# Altium PCB Copy of PCB1.PcbDoc (part 6 of 9)
Units mm, origin at the board's own origin, x right, y up, seen from the top; angles counter-clockwise.
Board outline 100 x 100 mm, 6 copper layers (Top Layer, Int1 (GND), Int2 (Sign), Int3 (Sign), Int4 (PWR), Bottom Layer), stack 1.538 mm thick; 614 components, 712 nets, 3013 pads, 501 vias.
Unrouted connection lines stored in the file: 259.
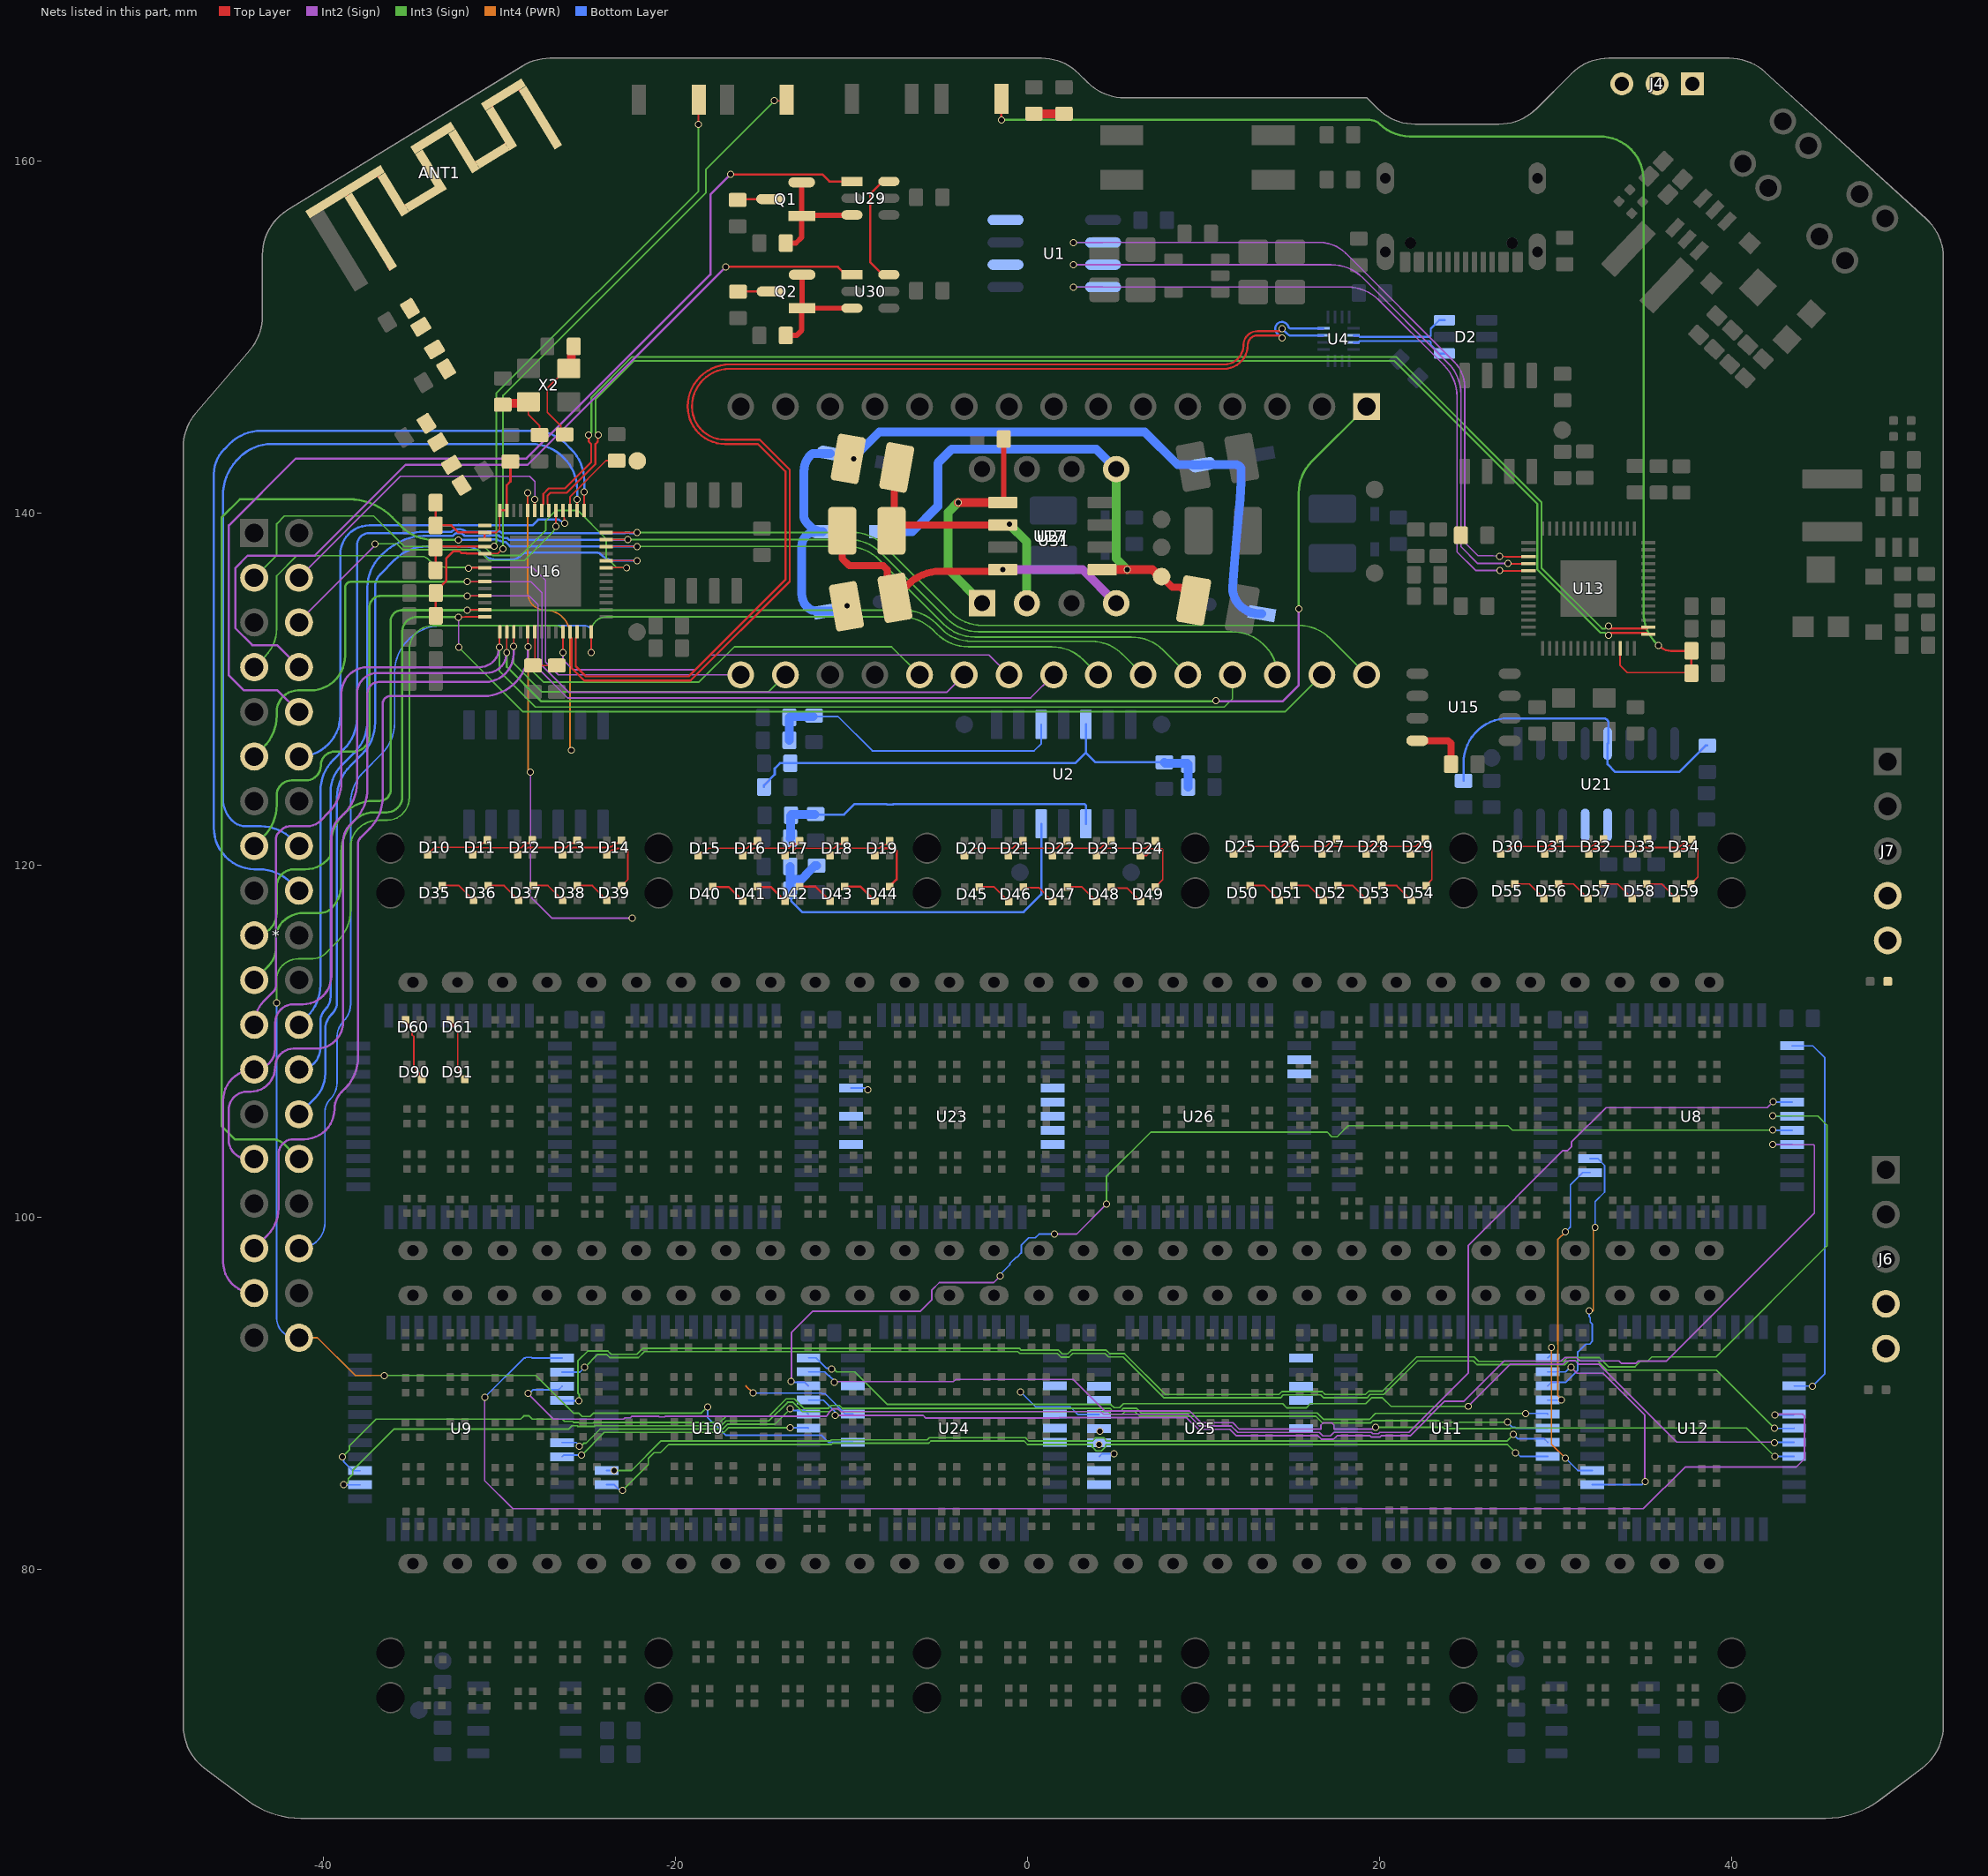
[diagram p9: the nets of this part, all layers, seen from the top]

## Via types
v1: diameter 0.4, hole 0.3, Top Layer to Bottom Layer, tented both sides, 494 vias
v2: diameter 0.4, hole 0.3, Top Layer to Bottom Layer, 5 vias
v3: diameter 0.4, hole 0.3, Top Layer to Bottom Layer, tented top, 1 vias
v4: diameter 0.6, hole 0.5, Top Layer to Bottom Layer, 1 vias

## Nets (pads, with @x,y where several pads share a name; then routed paths per layer and width w, separated by ;. In a path a pad name is that pad's centre, name@x,y a point inside that pad or via, vN(x,y) a via of type N, cw(c..) or ccw(c..) an arc to the next point about the centre after c; other vN are vias at no path point) (continued)
D0: *.29 Q1.3 R48.2 U16.17 U24.31 U31.17 | length 62.3
  Top Layer w0.09: v1(-29.211,132.436) -29.208,132.439 -29.208,133.262 U16.17@-29.204,133.265
  Top Layer w0.127: R48.2@-16.486,157.807 -16.436,157.858 Q1.3@-14.666,157.858
  Int2 (Sign) w0.127: *.29@-43.949,103.323 -44.313,103.323 cw(c-44.313,104.415) -45.405,104.415 -45.405,106.095 cw(c-44.355,106.095) -44.355,107.145 -44.157,107.145 ccw(c-44.157,108.537) -42.765,108.537 cw(c-41.715,108.537) -41.715,109.587 -40.428,109.587 ccw(c-40.428,111.12) -38.895,111.12 -38.895,121.405 cw(c-37.667,121.405) -38.535,122.273 -38.26,122.548 ccw(c-40.057,124.344) -37.517,124.344 -37.517,129.785 cw(c-36.882,129.785) -36.882,130.42 -30.828,130.42 ccw(c-30.828,132.032) -29.215,132.032 -29.215,132.436 v1(-29.211,132.436)
  Int3 (Sign) w0.09: v1(-29.211,132.436) -29.211,131.479 -27.59,129.858 -14.738,129.858 U31.17@-13.769,130.827
D1: *.7 Q2.3 R50.2 U16.7 U23.30 U31.16 | length 41.7
  Top Layer w0.09: v1(-31.778,136.882) -31.76,136.9 -30.875,136.9 U16.7@-30.857,136.918
  Top Layer w0.127: R50.2@-16.462,152.594 -16.449,152.608 Q2.3@-14.645,152.608
  Int2 (Sign) w0.09: v1(-31.778,136.882) -31.733,136.927 -28.129,136.927 -27.404,136.203 -27.404,131.555 -26.676,130.827 U31.16@-16.309,130.827
  Int3 (Sign) w0.09: *.7@-43.949,131.263 -43.324,131.888 ccw(c-44.891,133.455) -42.675,133.455 -42.675,136.025 cw(c-40.985,136.025) -42.673,136.111 -42.673,136.454 -41.532,137.595 -35.708,137.595 -35.661,137.548 -34.318,137.548 cw(c-34.592,136.776) -34.013,137.355 ccw(c-32.979,138.389) -32.979,136.927 -31.823,136.927 v1(-31.778,136.882)
  Bottom Layer w0.09: U23.30@-10.048,107.348 -9.133,107.348 -9.08,107.295 v1(-9.08,107.245)
D2: *.33 U16.19 U24.29 U31.20 | length 97.9
  Top Layer w0.09: U16.19@-28.404,133.265 -28.399,133.26 -28.399,132.42 v1(-28.393,132.414)
  Int2 (Sign) w0.09: v1(-28.254,125.31) -28.254,118.224 -27.03,117 v1(-22.47,117)
  Int2 (Sign) w0.127: *.33@-43.949,98.243 -43.201,98.991 ccw(c-44.725,100.515) -42.57,100.515 -42.57,103.587 cw(c-41.715,103.587) -41.715,104.442 -41.113,104.442 ccw(c-41.113,106.164) -39.39,106.164 cw(c-38.037,106.164) -38.994,107.121 -38.792,107.323 ccw(c-40.588,109.119) -38.048,109.119 -38.048,121.258 cw(c-37.611,121.258) -37.92,121.566 -37.395,122.092 ccw(c-39.191,123.888) -36.659,123.687 -36.659,129.168 -36.659,129.168 cw(c-36.206,129.168) -36.206,129.622 -30.933,129.622 ccw(c-30.933,132.162) v1@-28.405,132.413
  Int3 (Sign) w0.09: v1(-28.393,132.414) -28.393,131.292 -27.521,130.42 -18.677,130.42 -16.676,132.42 -7.743,132.42 U31.20@-6.149,130.827
  Int4 (PWR) w0.09: v1(-28.393,132.414) -28.393,125.449 ccw(c-28.254,125.449) v1(-28.254,125.31) ; -16.011,90.428 -15.623,90.041 v1(-15.6,90.041)
  Bottom Layer w0.09: v1(-15.6,90.041) -15.577,90.018 -11.725,90.018 -11.687,89.98 -11.512,89.98 -10.355,88.823 U24.29@-9.93,88.823
D3: *.11 U16.9 U23.28 U31.21 | length 54.3
  Top Layer w0.09: v1(-31.846,136.12) -31.844,136.118 U16.9@-30.857,136.118
  Int2 (Sign) w0.09: v1(-31.846,136.12) -28.233,136.12 -27.604,135.491 -27.604,131.355 -26.089,129.84 -4.596,129.84 U31.21@-3.609,130.827
  Int3 (Sign) w0.127: *.11@-43.949,126.183 -43.419,126.713 ccw(c-45.215,128.509) -42.675,128.509 -42.675,128.723 cw(c-41.453,128.723) -41.453,129.945 -40.749,129.945 ccw(c-40.749,131.904) -38.79,131.904 -38.79,135.764 cw(c-38.434,135.764) -38.434,136.12 v1(-31.846,136.12)
D4: *.38 U16.24 U24.27 U31.22 | length 118.2
  Top Layer w0.09: U16.24@-26.404,133.265 -26.404,132.034 -26.403,132.032 v1(-26.403,132.085)
  Int2 (Sign) w0.09: v1(-26.403,132.085) -26.403,131.681 -25.838,131.117 -18.883,131.117 -18.04,131.96 -2.202,131.96 U31.22@-1.069,130.827
  Int3 (Sign) w0.09: v1(-42.675,112.187) -42.675,113.523 cw(c-41.548,113.523) -42.345,114.32 cw(c-41.439,113.414) -41.439,114.695 -40.626,114.695 ccw(c-40.626,115.702) -39.914,114.99 -39.217,115.687 ccw(c-41.013,117.483) -38.473,117.483 -38.473,121.054 cw(c-37.022,121.054) -38.048,122.08 cw(c-36.866,120.898) -36.866,122.57 -36.374,122.57 ccw(c-36.374,123.756) -35.535,122.917 ccw(c-36.49,123.872) -35.14,123.872 -35.14,132.276 cw(c-33.799,132.276) -33.799,133.616 -26.767,133.616 cw(c-26.767,133.252) -26.403,133.252 v1(-26.403,132.085) ; v1(-36.555,91.02) -27.951,91.02 -25.814,88.883 -25.516,88.883 -25.326,88.693 -24.86,88.693 -24.67,88.883 -18.542,88.883 v1(-18.195,89.229)
  Int4 (PWR) w0.09: *.38@-41.409,93.163 -40.355,93.163 -38.212,91.02 v1(-36.555,91.02)
  Bottom Layer w0.09: v1(-42.675,112.187) -42.675,94.29 ccw(c-41.548,94.29) -41.548,93.163 *.38@-41.409,93.163 ; v1(-18.195,89.229) -18.195,88.649 -17.174,87.628 -11.735,87.628 -11.33,87.223 U24.27@-9.93,87.223
D5: *.15 U16.11 U23.26 U31.23 | length 63.1
  Top Layer w0.09: v1(-31.846,135.31) -31.839,135.318 U16.11@-30.857,135.318
  Int2 (Sign) w0.09: v1(-31.846,135.31) -28.333,135.31 -27.826,134.804 -27.826,131.198 -26.138,129.51 0.154,129.51 U31.23@1.471,130.827
  Int3 (Sign) w0.127: *.15@-43.949,121.103 -43.419,121.633 ccw(c-45.215,123.429) -42.675,123.429 -42.675,123.975 cw(c-41.82,123.975) -41.82,124.83 -41.01,124.83 ccw(c-41.01,125.67) -40.17,125.67 cw(c-39.375,125.67) -39.375,126.465 -38.325,126.465 ccw(c-38.325,127.38) -37.41,127.38 -37.41,134.657 cw(c-36.757,134.657) -36.757,135.31 v1(-31.846,135.31)
D6: *.34 U16.28 U24.3 U31.24 | length 81.5
  Top Layer w0.09: v1(-24.804,132.082) U16.28@-24.804,133.265
  Int3 (Sign) w0.09: v1(-24.804,132.082) -24.804,133.265 cw(c-23.952,133.265) -23.952,134.118 -7.186,134.118 cw(c-7.186,131.578) -5.39,133.374 -5.18,133.164 ccw(c-3.384,134.96) -3.384,132.42 1.365,132.42 cw(c1.365,129.88) 3.161,131.676 U31.24@4.011,130.827
  Bottom Layer w0.09: *.34@-41.409,98.243 ccw(c-41.409,99.722) -39.93,99.722 -39.93,106.011 cw(c-38.97,106.011) -39.649,106.69 ccw(c-40.623,107.665) -39.245,107.665 -39.245,110.275 cw(c-38.05,110.275) -38.895,111.12 ccw(c-39.914,112.139) -38.473,112.139 -38.473,123.519 cw(c-35.933,123.519) -37.729,125.315 -36.714,126.33 ccw(c-38.51,128.126) -35.97,128.126 -35.97,130.989 cw(c-33.43,130.989) -35.226,132.785 -35.139,132.872 cw(c-33.343,131.076) -33.343,133.616 -25.155,133.616 cw(c-25.155,133.265) -24.804,133.265 v1(-24.804,132.082)
D7: *.19 U16.13 U23.4 U31.25 | length 68.1
  Top Layer w0.09: v1(-31.841,134.5) -31.823,134.518 U16.13@-30.857,134.518
  Int3 (Sign) w0.09: v1(-31.841,134.5) -10.558,134.5 ccw(c-10.279,134.745) -10,134.5 -7.02,134.5 cw(c-7.02,131.96) -5.224,133.756 -4.744,133.275 ccw(c-3.178,135.275) -3.178,132.735 3.59,132.735 cw(c3.59,130.195) 5.386,131.991 U31.25@6.551,130.827
  Int3 (Sign) w0.127: *.19@-43.949,116.023 ccw(c-43.949,117.297) -42.675,117.297 -42.675,118.8 cw(c-41.7,118.8) -41.7,119.775 -41.053,119.775 ccw(c-41.053,121.509) -39.826,120.283 -39.738,120.371 ccw(c-40.039,120.672) -39.614,120.672 -39.614,121.114 cw(c-37.074,121.114) -38.87,122.91 -38.778,123.002 cw(c-37.179,121.403) -37.179,123.665 -36.825,123.665 ccw(c-36.825,124.287) -36.202,124.287 -36.202,133.868 cw(c-35.57,133.868) -35.57,134.5 v1(-31.841,134.5)
D8: *.30 U16.39 U24.5 U31.26 | length 100.3
  Top Layer w0.09: U16.39@-23.952,138.118 v1(-22.196,138.118)
  Int3 (Sign) w0.09: v1(-22.196,138.118) -10.245,138.118 cw(c-10.245,135.578) -8.449,137.374 -4.794,133.719 ccw(c-2.998,135.515) -2.998,132.975 5.89,132.975 cw(c5.89,130.435) 7.686,132.231 U31.26@9.091,130.827
  Int3 (Sign) w0.127: *.30@-41.409,103.323 -42.249,104.162 ccw(c-42.924,103.487) -42.924,104.442 -44.013,104.442 -45.057,104.442 -45.795,105.18 -45.795,139.779 -44.769,140.805 -38.585,140.805 cw(c-38.585,137.292) -36.1,139.776 -35.561,139.236 ccw(c-33.765,141.032) -33.765,138.492 v1(-32.345,138.492)
  Bottom Layer w0.127: v1(-32.345,138.492) -30.505,138.492 -30.484,138.513 -30.161,138.513 -30.125,138.478 cw(c-30.294,137.517) -29.816,138.367 -29.654,138.367 -29.426,138.139 -29.426,138.12 ccw(c-29.39,138.421) -29.39,138.118 v1(-22.196,138.118)
D9: *.23 U16.15 U23.6 U31.27 | length 79
  Top Layer w0.09: v1(-30.025,132.404) -30.025,132.933 U16.15@-30.004,133.265
  Int2 (Sign) w0.127: *.23@-43.449,111.443 *.23@-43.949,110.943 cw(c-42.014,110.943) -43.383,112.311 -42.882,112.811 ccw(c-43.31,113.239) -42.705,113.239 -42.705,121.567 cw(c-42.348,121.567) -42.6,121.819 -42.373,122.047 cw(c-41.955,121.629) -41.955,122.22 -40.965,122.22 ccw(c-40.965,123.332) -40.179,122.546 -39.738,122.986 ccw(c-41.534,124.782) -38.994,124.782 -38.994,129.785 cw(c-37.517,129.785) -37.517,131.263 -31.165,131.263 ccw(c-31.165,132.404) -30.118,131.95 ccw(c-30.234,132.001) -30.11,131.976 v1(-30.025,132.404)
  Int3 (Sign) w0.09: v1(-30.025,132.404) -30.025,131.048 -27.973,128.995 11.166,128.995 11.631,129.46 U31.27@11.631,130.827
D10: *.26 U16.40 U24.6 U31.28 | length 86.9
  Top Layer w0.09: U16.40@-23.952,138.518 -23.951,138.516 -23.179,138.516 cw(c-23.179,138.426) -23.173,138.516 ccw(c-23.167,138.606) -23.169,138.516 -23.101,138.514 v1(-22.72,138.508)
  Int3 (Sign) w0.09: v1(-22.72,138.508) -10.14,138.508 cw(c-10.14,135.968) -8.344,137.764 -4.599,134.019 ccw(c-2.803,135.815) -2.803,133.275 11.608,133.275 cw(c11.608,130.735) 13.404,132.531 13.508,132.427 cw(c11.907,130.827) U31.28@14.171,130.827
  Bottom Layer w0.127: *.26@-41.409,108.403 ccw(c-41.409,109.62) -40.192,109.62 -40.192,111.14 cw(c-39.245,111.14) -39.915,111.81 ccw(c-40.643,112.538) -39.614,112.538 -39.614,124.175 cw(c-37.499,124.175) -38.994,125.67 -38.26,126.404 ccw(c-40.057,128.2) -37.517,128.2 -37.517,135.783 cw(c-34.977,135.783) -36.773,137.579 -36.706,137.646 cw(c-35.352,136.293) -36.551,137.785 cw(c-34.843,136.077) -35.86,138.268 ; -35.859,138.268 ccw(c-35.913,138.383) -35.845,138.276 cw(c-34.343,135.952) -34.343,138.719 -32.723,138.719 ccw(c-32.723,138.846) -32.63,138.76 cw(c-32.345,138.492) -32.334,138.883 ccw(c-32.332,139.01) -32.329,138.883 cw(c-32.318,138.492) -32.001,138.719 -30.599,138.719 -30.578,138.74 -30.067,138.74 -30.013,138.686 cw(c-30.294,137.517) -29.76,138.594 -29.56,138.594 -29.458,138.492 -23.253,138.492 ccw(c-23.253,138.619) -23.248,138.492 -23.175,138.495 ; -23.174,138.495 v1(-22.72,138.508)
D11: *.21 U16.14 U23.5 U31.29 | length 83.2
  Top Layer w0.09: v1(-32.346,134.109) -31.968,134.118 cw(c-31.966,134.028) -31.966,134.118 U16.14@-30.857,134.118
  Int2 (Sign) w0.09: v1(-32.346,134.109) -32.337,134.1 -32.337,132.394 v1(-32.328,132.385)
  Int3 (Sign) w0.09: v1(-32.328,132.385) -28.673,128.731 14.614,128.731 U31.29@16.711,130.827
  Int3 (Sign) w0.127: *.21@-43.949,113.483 -43.156,114.276 ccw(c-44.245,115.365) -42.705,115.365 -42.705,115.921 cw(c-41.476,115.921) -42.345,116.79 cw(c-41.121,115.566) -41.121,117.297 -40.192,117.297 ccw(c-40.192,118.177) -39.57,117.555 ccw(c-40.96,118.945) -38.994,118.945 -38.994,120.776 cw(c-36.489,120.776) -38.26,122.548 cw(c-37.132,121.42) -37.132,123.015 -36.435,123.015 ccw(c-36.435,123.915) -35.535,123.915 -35.535,133.293 cw(c-34.718,133.293) -35.355,133.804 cw(c-34.718,133.293) -34.718,134.109 v1(-32.346,134.109)
D12: *.24 U16.41 U24.7 U31.30 | length 91
  Top Layer w0.09: U16.41@-23.952,138.918 v1(-22.187,138.918)
  Int3 (Sign) w0.09: v1(-22.187,138.918) -9.965,138.918 cw(c-9.965,136.378) -8.169,138.174 -4.374,134.379 ccw(c-2.578,136.175) -2.578,133.635 15.39,133.635 cw(c15.39,131.095) 17.186,132.891 U31.30@19.251,130.827
  Bottom Layer w0.127: *.24@-41.409,110.943 -40.936,111.416 ccw(c-42.732,113.212) -40.192,113.212 -40.192,124.209 cw(c-37.652,124.209) -39.448,126.005 -38.859,126.595 ccw(c-40.655,128.391) -38.115,128.391 -38.115,138.178 cw(c-37.41,138.178) -37.41,138.883 -34.969,138.883 ccw(c-34.969,139.01) -34.944,138.885 cw(c-34.343,135.952) -34.343,138.946 -32.811,138.946 ccw(c-32.811,139.073) -32.732,138.974 cw(c-32.345,138.492) -32.333,139.11 ccw(c-32.332,139.237) -32.33,139.11 cw(c-32.318,138.492) -31.9,138.946 -30.693,138.946 -30.672,138.967 -29.973,138.967 -29.895,138.89 cw(c-30.294,137.517) -29.89,138.888 ccw(c-29.854,139.01) -29.854,138.883 -22.926,138.883 ccw(c-22.926,139.01) -22.895,138.887 cw(c-22.799,138.508) -22.769,138.898 ccw(c-22.759,139.024) -22.751,138.898 cw(c-22.72,138.508) -22.624,138.887 ccw(c-22.593,139.01) -22.593,138.883 -22.222,138.883 ccw(c-22.222,138.918) v1(-22.187,138.918)
D13: *.25 *.35 U16.16 U23.7 U31.1 | length 114.6
  Top Layer w0.09: v1(-29.606,132.085) -29.604,132.464 U16.16@-29.604,133.265
  Int2 (Sign) w0.127: *.35@-43.949,95.703 cw(c-43.949,97.473) -45.72,97.473 -45.72,106.632 cw(c-43.949,106.632) *.25@-43.949,108.403 ccw(c-43.949,109.587) -42.765,109.587 -42.765,111.06 cw(c-41.715,111.06) -41.715,112.11 -41.189,112.11 ccw(c-41.189,113.729) -39.57,113.729 -39.57,121.638 cw(c-38.198,121.638) -39.168,122.608 -38.859,122.917 ccw(c-40.655,124.713) -38.115,124.713 -38.115,129.75 cw(c-36.93,129.75) -36.93,130.935 -30.754,130.935 ccw(c-30.754,132.085) -29.698,131.631 ccw(c-29.814,131.681) -29.69,131.657 v1(-29.606,132.085) ; v1(10.692,129.367) 10.744,129.316 14.464,129.316 15.39,130.243 v1(15.39,134.565)
  Int3 (Sign) w0.127: v1(-29.606,132.085) -29.606,131.29 -27.632,129.316 10.641,129.316 v1(10.692,129.367) ; v1(15.39,134.565) 15.39,141.154 cw(c17.93,141.154) 16.134,142.95 U31.1@19.251,146.067
DAC-SS_1: U1.2 U13.3 | length 40.4
  Top Layer w0.09: v1(26.809,137.563) 27.182,137.535 ccw(c27.189,137.625) 27.189,137.535 U13.3@28.453,137.535
  Int2 (Sign) w0.09: v1(2.592,155.388) 16.6,155.388 cw(c16.6,153.326) 18.058,154.784 24.221,148.621 cw(c22.763,147.163) 24.825,147.163 24.825,138.346 25.577,137.593 26.429,137.593 cw(c26.429,137.503) 26.436,137.593 v1(26.809,137.563)
  Bottom Layer w0.09: v1(2.592,155.388) U1.2@4.275,155.388
DAC_0_OUT_9: U1.8 U21.13
DAC_1_OUT_9: U1.6 U21.12
DAC_CLOCK_1: U1.3 U13.4 | length 40
  Top Layer w0.09: v1(27.29,137.152) 27.308,137.135 U13.4@28.453,137.135
  Int2 (Sign) w0.09: v1(2.592,154.128) 17.241,154.128 cw(c17.241,151.588) 19.037,153.384 23.866,148.556 cw(c22.069,146.76) 24.609,146.76 24.609,138.11 25.567,137.152 v1(27.29,137.152)
  Bottom Layer w0.09: v1(2.592,154.128) U1.3@4.275,154.128
DAC_DATA_1: U1.4 U13.5 | length 39.8
  Top Layer w0.09: v1(26.82,136.761) 26.845,136.735 U13.5@28.453,136.735
  Int2 (Sign) w0.09: v1(2.592,152.858) 18.154,152.858 cw(c18.154,150.318) 19.95,152.114 23.648,148.416 cw(c21.852,146.62) 24.392,146.62 24.392,137.807 25.438,136.761 v1(26.82,136.761)
  Bottom Layer w0.09: v1(2.592,152.858) U1.4@4.275,152.858
DE0_3: U8.5 U9.3 | length 87.8
  Int2 (Sign) w0.09: v1(-28.399,90.003) -26.939,88.543 -22.961,88.543 -22.886,88.618 -22.578,88.618 -22.497,88.699 -20.97,88.699 -20.939,88.668 -20.631,88.668 -20.601,88.699 -11.462,88.699 -11.304,88.856 -11.304,88.909 -11.086,89.127 -10.778,89.127 -10.619,88.968 4.139,88.968 4.295,88.812 9.11,88.812 9.773,88.149 11.565,88.149 11.926,87.788 16.566,87.788 16.765,87.589 17.2,87.589 17.399,87.788 19.531,87.788 19.61,87.709 19.918,87.709 19.997,87.788 21.65,87.788 25.031,91.168 25.031,98.415 30.414,103.798 30.672,103.798 30.89,104.016 30.89,104.275 32.855,106.239 42.013,106.239 v1(42.35,106.576)
  Bottom Layer w0.09: v1(-28.399,90.003) -28.326,90.003 -28.126,90.203 -26.665,90.203 U9.3@-26.46,90.408 ; v1(42.35,106.576) 42.379,106.548 U8.5@43.422,106.548
DE1_3: U8.6 U9.4 | length 91.5
  Int3 (Sign) w0.09: v1(-25.503,89.586) -25.489,89.6 -25.489,89.948 -25.552,90.011 -25.552,91.864 -25.007,92.409 -23.852,92.409 -23.671,92.228 -22.201,92.228 -21.859,92.57 -0.489,92.57 -0.379,92.46 1.748,92.46 1.956,92.252 2.264,92.252 2.472,92.46 4.456,92.46 4.653,92.262 5.495,92.262 7.816,89.941 14.272,89.941 14.438,90.107 16.73,90.107 16.896,89.941 19.187,89.941 19.377,90.131 20.154,90.131 22.093,92.07 25.357,92.07 25.606,91.821 30.429,91.821 30.645,92.037 32.471,92.037 32.991,91.517 34.501,91.517 34.826,91.842 35.227,91.842 35.456,92.07 39.094,92.07 45.405,98.382 45.405,105.24 44.882,105.763 v1(42.323,105.763)
  Bottom Layer w0.09: U9.4@-26.46,89.608 -26.413,89.561 -26.388,89.586 v1(-25.503,89.586) ; v1(42.323,105.763) 42.338,105.748 U8.6@43.422,105.748
DEV_BOOT: *.28 U16.37 U25.3 | length 49.5
  Top Layer w0.09: U16.37@-23.952,137.318 v1(-22.199,137.318)
  Bottom Layer w0.127: *.28@-41.409,105.863 -40.503,106.769 ccw(c-41.923,108.189) -39.915,108.189 -39.915,110.689 cw(c-38.737,110.689) -39.57,111.521 -39.533,111.559 ccw(c-40.227,112.253) -39.245,112.253 -39.245,123.846 cw(c-36.705,123.846) -38.501,125.642 -37.824,126.319 ccw(c-39.62,128.115) -37.08,128.115 -37.08,135.831 cw(c-36.083,135.831) -36.788,136.536 -35.95,137.374 cw(c-34.154,135.578) -34.154,138.118 -32.473,138.118 cw(c-32.473,137.991) -32.441,138.114 ccw(c-32.345,138.492) -32.334,138.102 cw(c-32.332,137.975) -32.329,138.102 ccw(c-32.318,138.492) -32.208,138.118 -31.973,138.118 cw(c-31.973,136.752) -31.008,137.718 ccw(c-30.179,138.546) -30.179,137.375 -29.361,137.375 ccw(c-29.361,138.16) -29.086,137.424 ccw(c-29.361,138.16) -28.806,137.605 cw(c-28.418,137.218) -28.418,137.765 -24.479,137.765 cw(c-24.479,137.491) -24.285,137.685 ccw(c-23.398,138.572) -23.398,137.318 v1(-22.199,137.318)
DEV_RESET: *.3 U16.36 U25.4 | length 29.1
  Top Layer w0.09: U16.36@-23.952,136.918 v1(-22.788,136.918)
  Int3 (Sign) w0.09: *.3@-43.949,136.343 -42.675,137.617 -42.675,139.41 -42.23,139.855 -37.161,139.855 -35.424,138.118 -30.895,138.118 -30.382,137.605 -28.822,137.605 -27.385,139.042 -27.385,139.589 -26.804,140.17 -25.572,140.17 -23.952,138.55 -23.952,137.5 -23.37,136.918 v1(-22.788,136.918)
DF0_3: U8.7 U10.3 | length 67.5
  Int2 (Sign) w0.09: v1(-13.446,90.676) -13.428,90.694 -13.428,93.462 -12.225,94.665 -6.12,94.665 -5.449,95.336 -5.449,95.875 -5.026,96.298 -1.941,96.298 v1(-1.569,96.67) ; v1(1.514,99.051) 2.766,99.051 v1(4.47,100.755)
  Int3 (Sign) w0.09: v1(4.47,100.755) 4.47,102.329 6.988,104.846 17.015,104.846 17.274,104.588 17.582,104.588 18.205,105.21 27.281,105.21 27.532,104.96 v1(42.316,104.96)
  Bottom Layer w0.09: v1(-13.446,90.676) -13.398,90.628 -12.665,90.628 U10.3@-12.46,90.423 ; v1(-1.569,96.67) -1.569,96.754 -1.015,97.307 -1.015,97.382 -0.653,97.744 -0.606,97.744 -0.369,97.981 -0.369,98.415 0.054,98.838 0.426,98.838 0.637,99.048 1.511,99.048 v1(1.514,99.051) ; v1(42.316,104.96) 42.328,104.948 U8.7@43.422,104.948
DF1_3: U8.8 U10.4 | length 71.2
  Int2 (Sign) w0.09: v1(-10.932,88.755) -5.95,88.755 -5.791,88.596 -5.79,88.597 1.762,88.597 1.787,88.622 9.031,88.622 9.694,87.959 11.487,87.959 11.848,87.598 16.487,87.598 16.686,87.399 17.367,87.399 17.566,87.598 19.452,87.598 19.531,87.519 19.996,87.519 20.075,87.598 21.729,87.598 23.693,89.561 24.784,89.561 27.068,91.845 30.311,91.845 30.502,92.037 30.69,92.037 30.704,92.052 31.17,92.052 31.377,91.845 33.593,91.845 33.731,91.707 34.548,91.707 34.683,91.842 36.29,91.842 44.692,100.244 44.692,104.08 44.64,104.133 v1(42.316,104.133)
  Bottom Layer w0.09: U10.4@-12.46,89.623 -11.616,89.623 -10.932,88.939 v1(-10.932,88.755) ; v1(42.316,104.133) 42.331,104.148 U8.8@43.422,104.148
DG0_3: U8.25 U11.3 | length 15.7
  Int4 (PWR) w0.09: v1(31.899,94.684) 31.906,94.691 32.132,94.691 32.132,99.239 32.234,99.341 v1(32.234,99.425)
  Bottom Layer w0.09: U11.3@29.54,90.423 29.745,90.628 30.556,90.628 31.25,91.321 31.25,92.358 31.698,92.806 31.924,92.806 32.068,92.949 32.068,93.952 31.958,94.062 31.958,94.304 31.899,94.363 v1(31.899,94.684) ; U8.25@31.952,103.348 32.377,103.348 32.772,102.953 32.772,101.438 32.234,100.899 v1(32.234,99.425)
DG1_3: U8.24 U11.4 | length 14.8
  Int4 (PWR) w0.09: v1(30.31,89.622) 30.31,89.697 30.111,89.896 30.111,92.457 30.124,92.47 30.124,92.778 30.111,92.791 30.111,98.742 v1(30.545,99.176)
  Bottom Layer w0.09: U11.4@29.54,89.623 30.309,89.623 v1(30.31,89.622) ; v1(30.545,99.176) 30.794,99.425 30.799,99.42 30.825,99.42 30.825,101.846 31.527,102.548 U8.24@31.952,102.548
DH0_3: U8.1 U12.3 | length 22.1
  Bottom Layer w0.09: U8.1@43.422,109.748 44.605,109.748 45.285,109.067 45.285,91.121 v1(44.582,90.418) 44.578,90.423 U12.3@43.54,90.423
EF0_3: U9.7 U10.5 | length 15.1
  Int3 (Sign) w0.09: v1(-25.479,87.003) -25.395,87.003 -25.228,87.17 -25.108,87.17 -24.305,87.973 -17.341,87.973 -17.068,88.246 -14.377,88.246 v1(-13.494,89.13)
  Bottom Layer w0.09: U9.7@-26.46,87.208 -25.656,87.208 -25.479,87.031 v1(-25.479,87.003) ; v1(-13.494,89.13) -13.41,89.13 -13.307,89.028 -12.665,89.028 U10.5@-12.46,88.823
EF1_3: U9.8 U10.6 | length 14.7
  Int3 (Sign) w0.09: v1(-25.347,86.492) -24.056,87.783 -17.262,87.783 -16.989,88.056 -13.494,88.056 v1(-13.491,88.053)
  Bottom Layer w0.09: U9.8@-26.46,86.408 -26.376,86.492 v1(-25.347,86.492) ; v1(-13.491,88.053) -12.497,88.053 -12.494,88.056 U10.6@-12.46,88.023
EG0_3: U9.25 U11.5 | length 72.7
  Int3 (Sign) w0.09: v1(-38.932,86.408) -38.545,86.795 -38.545,87.013 -37.016,88.543 -28.815,88.543 -28.633,88.725 -28.325,88.725 -28.143,88.543 -26.441,88.543 -26.316,88.418 -25.873,88.418 -25.808,88.353 -25.524,88.353 -25.483,88.313 -24.703,88.313 -24.663,88.353 -17.499,88.353 -17.153,88.699 -14.72,88.699 -13.726,89.692 -13.261,89.692 -12.727,89.158 -11.324,89.158 -11.165,89.317 -10.7,89.317 -10.541,89.158 4.668,89.158 4.824,89.002 5.289,89.002 5.445,89.158 6.169,89.158 6.432,88.895 16.437,88.895 16.809,88.523 19.411,88.523 19.753,88.865 v1(28.274,88.865)
  Bottom Layer w0.09: v1(-38.932,86.408) -38.873,86.349 -38.873,86.126 -38.355,85.608 U9.25@-37.93,85.608 ; v1(28.274,88.865) 29.498,88.865 U11.5@29.54,88.823
EG1_3: U9.24 U11.6 | length 72.5
  Int3 (Sign) w0.09: v1(-38.877,84.808) -38.793,84.808 -38.606,84.994 -38.606,85.159 -38.355,85.41 -38.355,85.628 -36.002,87.981 -26.068,87.981 -25.886,88.163 -25.602,88.163 -25.562,88.123 -24.624,88.123 -24.584,88.163 -17.42,88.163 -17.146,88.436 -14.713,88.436 -13.648,89.502 -13.339,89.502 -12.805,88.968 -11.245,88.968 -11.086,89.127 -10.778,89.127 -10.619,88.968 4.59,88.968 4.745,88.812 5.368,88.812 5.524,88.968 6.09,88.968 6.353,88.705 16.358,88.705 16.73,88.333 19.49,88.333 19.61,88.453 23.35,88.453 23.433,88.369 v1(27.257,88.369)
  Bottom Layer w0.09: v1(-38.877,84.808) U9.24@-37.93,84.808 ; v1(27.257,88.369) 27.257,88.353 27.518,88.093 27.681,88.093 27.751,88.023 U11.6@29.54,88.023
EH0_3: U9.1 U12.5 | length 92.2
  Int2 (Sign) w0.09: v1(-30.855,89.781) -30.855,85.041 -29.261,83.447 34.974,83.447 37.344,85.818 43.653,85.818 44.13,86.295 44.13,88.717 44.025,88.823 42.482,88.823 v1(42.44,88.781)
  Bottom Layer w0.09: v1(-30.855,89.781) -28.628,92.008 -28.561,92.008 -28.517,92.052 -28.208,92.052 -28.164,92.008 U9.1@-26.46,92.008 ; v1(42.44,88.781) 43.498,88.781 U12.5@43.54,88.823
EH1_3: U9.2 U12.6 | length 74.7
  Int3 (Sign) w0.09: v1(-25.176,91.475) -24.432,92.219 -23.931,92.219 -23.75,92.038 -22.122,92.038 -21.78,92.38 -0.567,92.38 -0.457,92.27 1.67,92.27 1.878,92.062 2.343,92.062 2.551,92.27 4.377,92.27 4.575,92.072 5.416,92.072 7.737,89.751 14.351,89.751 14.517,89.917 16.651,89.917 16.817,89.751 19.266,89.751 19.456,89.941 20.233,89.941 22.145,91.853 25.306,91.853 25.528,91.631 30.508,91.631 30.724,91.847 32.392,91.847 32.913,91.327 39.12,91.327 v1(42.431,88.015)
  Bottom Layer w0.09: U9.2@-26.46,91.208 -25.443,91.208 v1(-25.176,91.475) ; v1(42.431,88.015) 43.532,88.015 U12.6@43.54,88.023
ESD_U+_2: D2.6 U4.2 | length 5.8
  Bottom Layer w0.116: U4.2@18.506,150.108 18.785,150.108 18.863,150.029 21.901,150.029 22.829,150.029 22.897,150.097 22.897,150.495 23.381,150.979 D2.6@23.681,150.979
ESD_U-_2: D2.4 U4.3 | length 5.6
  Bottom Layer w0.116: U4.3@18.506,149.708 18.785,149.708 18.863,149.786 21.8,149.786 22.829,149.786 22.897,149.718 22.897,149.563 23.381,149.079 D2.4@23.681,149.079
ESP32_Rx_1: U13.29 U16.49 | length 77.6
  Top Layer w0.116: U16.49@-27.204,140.17 -27.204,140.448 -27.283,140.527 -27.283,141.008 -27.12,141.171 -26.2,141.171 -24.562,142.809 -24.562,143.94 -24.425,144.076 -24.425,144.439 v1(-24.415,144.45) ; v1(32.992,133.071) 33.135,133.213 35.182,133.213 U13.29@35.26,133.135
  Int3 (Sign) w0.105: v1(-24.415,144.45) -24.562,144.597 -24.562,146.483 -22.382,148.663 20.829,148.663 28.95,140.543 28.95,136.807 32.538,133.219 32.783,133.219 32.931,133.071 v1(32.992,133.071)
ESP32_Tx_1: U13.30 U16.50 | length 78
  Top Layer w0.116: U16.50@-27.604,140.17 -27.604,140.448 -27.526,140.527 -27.526,141.109 -27.221,141.414 -26.301,141.414 -24.804,142.91 -24.804,143.94 -24.941,144.076 -24.941,144.444 v1(-24.947,144.45) ; v1(32.992,133.598) 33.135,133.456 35.182,133.456 U13.30@35.26,133.535
  Int3 (Sign) w0.105: v1(-24.947,144.45) -24.942,144.45 -24.794,144.597 -24.794,146.58 -22.478,148.896 20.926,148.896 29.182,140.639 29.182,136.903 32.634,133.451 32.783,133.451 32.931,133.598 v1(32.992,133.598)
ESP_1_N: U4.12 U16.25 | length 70.7
  Top Layer w0.116: U16.25@-26.004,133.265 -26.004,132.988 -25.926,132.909 -25.926,131.213 -25.211,130.497 -19.159,130.497 -13.527,136.13 -13.527,142.484 -15.225,144.183 -17.196,144.183 cw(c-17.196,146.067) -19.08,146.067 cw(c-16.932,146.067) -16.932,148.215 11.148,148.215 ccw(c11.148,149.565) 12.498,149.565 cw(c13.04,149.565) 13.04,150.108 14.298,150.108 cw(c14.298,149.966) v1(14.44,149.966)
  Int2 (Sign) w0.105: v1(14.44,149.966) v1@14.44,150.113
  Bottom Layer w0.116: v1(14.44,149.966) 14.177,150.212 cw(c14.44,150.493) 14.812,150.593 ccw(c14.923,150.624) 14.923,150.508 U4.12@16.804,150.508
ESP_1_P: U4.11 U16.26 | length 68.8
  Top Layer w0.116: U16.26@-25.604,133.265 -25.604,132.988 -25.683,132.909 -25.683,131.313 -25.11,130.74 -25.068,130.74 -19.26,130.74 -13.769,136.231 -13.769,142.383 -15.326,143.94 -17.196,143.94 cw(c-17.196,146.067) -19.323,146.067 cw(c-16.932,146.067) -16.932,148.458 11.148,148.458 ccw(c11.148,149.565) 12.255,149.565 cw(c13.04,149.565) 13.04,150.35 14.298,150.35 ccw(c14.298,150.493) v1(14.44,150.493)
  Bottom Layer w0.116: v1(14.44,150.493) 14.702,150.248 cw(c14.44,149.966) 14.704,150.246 14.818,150.139 ccw(c14.897,150.224) 14.897,150.108 U4.11@16.804,150.108
ESP_ANT_6: C55.2 C56.2 L1.2 L2.1
ESP_BOOT_6: C72.2 R39.1 SW5.2 U16.5 | length 39.6
  Top Layer w0.09: U16.5@-30.857,137.718 -30.852,137.723 -30.1,137.723 -29.846,137.977 v1(-29.816,137.977) ; v1(-14.4,163.44) -13.763,163.44 SW5.2@-13.695,163.508
  Top Layer w0.127: C72.2@-33.64,134.18 R39.1@-33.64,135.47 -33.64,135.57 -33.045,136.164 -33.045,137.425 -32.617,137.853 -32.293,137.853 -32.186,137.746 -31.904,137.746 -31.876,137.718 U16.5@-30.857,137.718
  Int3 (Sign) w0.09: v1(-29.816,137.977) -29.816,146.704 -18.285,158.235 -18.285,159.555 v1(-14.4,163.44)
ESP_PWR_FILTERED_6: C58.2 C59.2 C60.2 C61.2 C65.2 L4.2 TP3.1 U16.2 U16.3 U16.20 U16.46 U16.55 U16.56 | length 17.5
  Top Layer w0.09: U16.2@-30.857,138.918 -30.2,138.918 -30.004,139.113 U16.56@-30.004,140.17 ; U16.20@-28.004,133.265 -28.004,131.458 C61.2@-28.108,131.355 C65.2@-26.767,131.355 ; U16.46@-26.004,140.17 -26.004,140.947 -23.956,142.996 C60.2@-23.362,142.996
  Top Layer w0.127: C59.2@-33.645,140.608 L4.2@-33.645,139.318 -32.745,139.318 -32.345,138.918 U16.2@-30.857,138.918 U16.3@-30.857,138.518 ; U16.56@-30.004,140.17 U16.55@-29.604,140.17 -29.604,141.598 -29.392,141.81 C58.2@-29.392,142.95
ESP_RESET_1: C71.2 R38.1 SW4.2 U16.4 U23.8 | length 34.9
  Top Layer w0.09: U16.4@-30.857,138.118 -30.524,138.102 -30.323,138.097 v1@-30.323,138.122 ; v1(-18.708,162.088) -18.708,163.495 SW4.2@-18.695,163.508
  Top Layer w0.127: C71.2@-33.645,136.758 R38.1@-33.645,138.058 -33.585,138.118 -32.473,138.118 cw(c-32.473,137.991) -32.441,138.114 ccw(c-32.345,138.492) -32.334,138.102 cw(c-32.332,137.975) -32.329,138.102 ccw(c-32.318,138.492) -32.208,138.118 U16.4@-30.857,138.118
  Int3 (Sign) w0.09: v1(-30.322,138.122) -30.322,138.206 -30.2,138.329 -30.2,146.815 -18.708,158.307 v1(-18.708,162.088)
ESP_XTAL_IN1_6: C69.2 L3.2 X2.3 | length 3.8
  Top Layer w0.09: X2.3@-28.375,146.335 -28.375,145.612 -27.745,144.983 L3.2@-27.745,144.458
  Top Layer w0.5: C69.2@-29.954,146.295 C69.2@-29.829,146.17 -29.746,146.252 -28.458,146.252 X2.3@-28.375,146.335
ESP_XTAL_IN2_6: C68.2 R37.1 X2.1 | length 6.2
  Top Layer w0.09: R37.1@-26.31,144.48 -26.526,144.696 -26.526,144.962 -27.299,145.735 -27.299,147.111 -26.175,148.235 X2.1@-26.075,148.235
  Top Layer w0.5: X2.1@-26.075,148.235 -25.937,148.373 -25.937,149.349 C68.2@-25.799,149.486 C68.2@-25.844,149.531
EX_GND_1: J7.5 JP6.1 U25.6
EXT_1_1: J4.1 U25.25
EXT_2_1: J4.2 U25.24
EXT_3_1: J4.3 U25.1
FG0_3: U10.25 U11.7 | length 54.8
  Int3 (Sign) w0.09: v1(-23.505,85.622) -22.522,85.622 -20.848,87.295 -11.227,87.295 -11.165,87.357 -5.717,87.357 -5.583,87.491 -0.134,87.491 0.061,87.295 3.658,87.295 3.671,87.295 3.854,87.479 4.321,87.479 4.418,87.382 4.418,87.348 ccw(c4.5,87.385) 4.5,87.295 27.211,87.295 v1(27.583,87.667)
  Bottom Layer w0.09: U10.25@-23.93,85.623 -23.929,85.622 v1(-23.505,85.622) ; v1(27.583,87.667) 27.823,87.428 29.335,87.428 U11.7@29.54,87.223
FG1_3: U10.24 U11.8 | length 55.8
  Int3 (Sign) w0.09: v1(-23.015,84.495) -21.56,85.95 -21.56,86.315 -21.237,86.638 -20.872,86.638 -20.409,87.1 -11.153,87.1 -11.086,87.167 -5.638,87.167 -5.504,87.301 -0.213,87.301 -0.013,87.1 3.656,87.1 cw(c3.655,87.01) 3.668,87.099 3.668,86.953 3.886,86.735 4.194,86.735 4.412,86.953 4.412,87.04 4.423,87.05 cw(c4.503,87.01) 4.502,87.1 ; 4.503,87.1 27.252,87.1 v1(27.721,86.632)
  Bottom Layer w0.09: U10.24@-23.93,84.823 -23.505,84.823 -23.237,84.554 -23.074,84.554 v1(-23.015,84.495) ; v1(27.721,86.632) 27.777,86.632 27.986,86.423 U11.8@29.54,86.423
FH0_3: U10.1 U12.7 | length 60.9
  Int2 (Sign) w0.09: v1(25.016,89.267) 27.404,91.655 30.389,91.655 30.581,91.847 30.768,91.847 30.783,91.862 31.091,91.862 31.298,91.655 32.45,91.655 36.87,87.235 42.385,87.235 v1(42.419,87.201)
  Int3 (Sign) w0.09: v1(-11.155,91.377) -11.135,91.397 -10.965,91.397 -10.965,91.324 -10.863,91.223 -9.829,91.223 -7.981,89.374 4.721,89.374 4.903,89.192 5.211,89.192 5.429,89.41 5.429,89.418 14.479,89.418 14.723,89.173 15.81,89.173 16.054,89.418 19.201,89.418 19.535,89.751 20.154,89.751 20.639,89.267 v1(25.016,89.267)
  Bottom Layer w0.09: U10.1@-12.46,92.023 -12.035,92.023 -11.487,91.475 -11.483,91.48 -11.44,91.437 -11.214,91.437 v1(-11.155,91.377) ; v1(42.419,87.201) 42.44,87.223 U12.7@43.54,87.223
FH1_3: U10.2 U12.8 | length 58.9
  Int2 (Sign) w0.09: v1(-10.988,90.633) -10.988,90.668 -4.226,90.668 -4.098,90.795 2.58,90.795 4.368,89.007 9.183,89.007 9.852,88.339 11.644,88.339 12.005,87.978 16.655,87.978 16.655,88.007 16.655,88.011 16.655,88.201 16.786,88.333 17.267,88.333 17.399,88.201 17.399,88.011 17.399,88.007 17.399,87.978 19.661,87.978 v1(19.764,88.081)
  Int3 (Sign) w0.09: v1(19.764,88.081) 23.576,88.081 23.659,87.997 27.387,87.997 27.429,88.039 40.821,88.039 v1(42.438,86.423)
  Bottom Layer w0.09: U10.2@-12.46,91.223 -11.527,91.223 -11.309,91.005 -11.274,91.005 -10.988,90.719 -10.988,90.668 v1(-10.988,90.633) ; v1@42.438,86.423 U12.8@43.54,86.423
GH0_3: U11.1 U12.25 | length 9.1
  Int4 (PWR) w0.09: v1(29.752,92.605) 29.752,87.115 v1(30.542,86.325)
  Bottom Layer w0.09: U11.1@29.54,92.023 29.547,92.023 29.752,92.228 v1(29.752,92.605) ; v1(30.542,86.325) 31.244,85.623 U12.25@32.07,85.623
GH1_3: U11.2 U12.24 | length 13.6
  Int2 (Sign) w0.09: v1(30.878,91.475) 31.209,91.144 32.692,91.144 35.047,88.789 35.047,85.011 v1(35.069,84.99)
  Bottom Layer w0.09: U11.2@29.54,91.223 30.551,91.223 30.804,91.475 v1(30.878,91.475) ; U12.24@32.07,84.823 34.902,84.823 v1(35.069,84.99)
GPIO0_RP_1: R40.1 U26.2 U29.6 U30.6 | length 6.6
  Top Layer w0.127: U30.6@-7.894,153.558 -8.232,153.558 -8.955,154.281 -8.955,158.135 -8.233,158.858 U29.6@-7.895,158.858
GPIO39: *.18 U16.44 U25.31 | length 52.3
  Top Layer w0.09: U16.44@-25.204,140.17 v1(-25.204,141.221)
  Bottom Layer w0.127: *.18@-41.409,118.563 -41.878,119.031 ccw(c-43.674,117.235) -43.674,119.775 cw(c-43.867,122.145) -46.245,122.146 -46.245,142.236 cw(c-44.268,142.236) -45.666,143.634 -45.348,143.952 cw(c-43.552,142.156) -43.552,144.696 -28.043,144.696 cw(c-28.043,142.156) -26.247,143.952 -25.948,143.654 cw(c-27.744,141.858) -25.204,141.858 v1(-25.204,141.221)
GPIO40: *.16 U16.45 U25.30 | length 47.3
  Top Layer w0.09: U16.45@-25.604,140.17 v1(-25.604,140.803)
  Bottom Layer w0.127: *.16@-41.409,121.103 -41.783,121.476 ccw(c-43.579,119.68) -43.579,122.22 -44.418,122.22 cw(c-44.418,123.332) -45.204,122.546 cw(c-43.923,123.827) -45.735,123.827 -45.735,140.99 cw(c-42.733,140.99) -44.769,143.196 cw(c-42.973,141.4) -42.973,143.94 -28.197,143.94 cw(c-28.197,141.4) -26.401,143.196 -26.348,143.143 cw(c-28.144,141.347) -25.604,141.347 v1(-25.604,140.803)
GPIO41: *.12 U16.47 U25.29 | length 32.4
  Top Layer w0.09: U16.47@-26.404,140.17 -26.35,139.838 v1(-26.307,139.446)
  Bottom Layer w0.09: v1(-0.41,90.083) 0.445,89.228 2.416,89.228 2.836,88.808 U25.29@4.055,88.808
  Bottom Layer w0.127: *.12@-41.409,126.183 ccw(c-41.409,128.532) -39.06,128.532 -39.06,137.668 cw(c-37.41,137.668) -37.41,139.318 -32.537,139.318 ccw(c-32.537,139.445) -32.512,139.32 cw(c-32.345,138.492) -32.333,139.337 ccw(c-32.332,139.464) -32.33,139.337 cw(c-32.318,138.492) -32.14,139.318 -28.14,139.318 -27.816,139.642 -26.954,139.642 ccw(c-26.954,139.769) -26.918,139.647 cw(c-26.804,139.273) -26.617,139.616 v1(-26.307,139.446)
GPIO42: *.6 J7.4 U16.48 U25.28 | length 18.9
  Top Layer w0.09: v1(-26.804,139.273) U16.48@-26.804,140.17
  Int2 (Sign) w0.09: *.6@-41.409,133.803 -41.409,133.871 -37.08,138.2 v1(-37.08,138.268)
  Int3 (Sign) w0.09: v1(-37.08,138.268) -35.843,138.268 -35.503,137.928 -31.218,137.928 -30.608,137.318 -28.6,137.318 -26.992,138.926 ccw(c-27.055,138.99) -26.975,138.948 v1(-26.804,139.273)
  Bottom Layer w0.09: U25.28@4.055,88.008 4.055,87.902 v1(4.106,87.851)
GPIO45: *.4 J6.5 U16.51 U25.27 | length 17.7
  Top Layer w0.09: U16.51@-28.004,140.17 v1(-28.004,140.803)
  Int2 (Sign) w0.09: *.4@-41.409,136.343 -35.642,142.11 -28.309,142.11 -28.004,141.805 v1(-28.004,140.803)
  Bottom Layer w0.09: v1(4.04,87.107) 4.073,87.14 U25.27@4.073,87.198
GPIO46: J6.4 U16.52 U25.26 | length 18
  Top Layer w0.09: v1(-28.415,141.171) -28.393,141.149 -28.404,141.138 U16.52@-28.404,140.17
  Int4 (PWR) w0.09: v1(-28.415,141.171) -28.415,135.51 ccw(c-27.404,135.51) -27.404,134.5 cw(c-27.404,133.1) -26.004,133.1 -26.004,126.62 ccw(c-25.926,126.62) v1(-25.926,126.541)
  Bottom Layer w0.09: U25.26@4.055,86.408 4.218,86.571 v1(4.902,86.571)
LM2660_BOOST_12: R12.2 U17.1 U27.1 | length 12.9
  Top Layer w0.3: U27.1@-1.365,140.668 R12.2@-1.365,144.225
  Top Layer w0.5: v1(-3.96,140.625) -3.952,140.617 -1.416,140.617 U27.1@-1.365,140.668
  Int3 (Sign) w0.5: v1(-3.96,140.625) -4.53,140.055 -4.53,136.827 U17.1@-2.593,134.891
LM2660_C1+_12: C19.1 C22.2 U17.2 U27.2 | length 14.9
  Top Layer w0.127: C22.2@-7.745,139.008 -7.586,139.167 C22.2@-7.41,139.343 ; C19.1@-7.586,142.467 C19.1@-7.445,142.608
  Top Layer w0.4: C22.2@-7.586,139.167 C19.1@-7.586,142.467 ; C22.2@-7.41,139.343 U27.2@-1.42,139.343
  Int3 (Sign) w0.5: v1(-1.05,139.38) -0.053,138.383 U17.2@-0.053,134.891
LM2660_C1-_12: C22.1 C24.2 U17.4 U27.4 | length 20.1
  Top Layer w0.4: C22.1@-10.545,139.008 -10.545,137.423 -10.148,137.025 -8.22,137.025 -7.995,136.8 -7.995,135.657 C24.2@-7.545,135.208 -6.787,135.966 cw(c-4.991,134.17) -4.991,136.71 -1.644,136.71 ccw(c-1.644,137.027) v1(-1.42,136.803)
  Int2 (Sign) w0.5: v1(-1.42,136.803) 3.115,136.803 U17.4@5.027,134.891
LM2660_OUT_12: C23.2 D6.1 TP14.1 U17.5 U27.5 | length 29
  Top Layer w0.4: TP14.1@7.605,136.408 8.214,135.798 8.678,135.798 C23.2@9.426,135.051
  Top Layer w0.5: U27.5@4.23,136.803 v1(5.652,136.803) 7.074,136.803 7.469,136.408 TP14.1@7.605,136.408
  Int3 (Sign) w0.5: U17.5@5.027,142.511 5.027,137.428 v1(5.652,136.803)
  Bottom Layer w0.5: D6.1@-8.245,138.958 -6.557,138.958 -5.115,140.4 -5.115,142.86 -4.337,143.638 3.9,143.638 U17.5@5.027,142.511
LNA_IN_6: C57.2 L2.2 U16.1
MCU_RUN_5: C53.2 R8.1 SW2.2 U13.26 | length 74.5
  Top Layer w0.09: U13.26@33.657,132.331 33.657,131.35 34.057,130.95 37.674,130.95 C53.2@37.703,130.921
  Top Layer w0.127: v1(-1.505,162.355) SW2.2@-1.505,163.556 ; v1(35.821,132.494) ccw(c36.554,133.228) 36.554,132.191 R8.1@37.703,132.191 C53.2@37.703,130.921
  Int3 (Sign) w0.127: v1(-1.505,162.355) 19.429,162.355 cw(c19.429,161.554) 19.995,162.12 ccw(c21.697,163.822) 21.697,161.415 32.486,161.415 cw(c32.486,158.875) 34.282,160.671 cw(c32.598,158.987) 34.98,158.987 34.98,134.387 ccw(c37.52,134.387) 35.724,132.591 v1(35.821,132.494)
MUX_NANO_RX_14: Q1.1 Q1.2 R47.2 U29.3 | length 7
  Top Layer w0.3: R47.2@-13.745,155.358 -13.172,155.358 -12.845,155.685 Q1.1@-12.845,156.908 ; Q1.2@-12.845,158.808 Q1.1@-12.845,156.908 ; U29.3@-9.996,156.958 -10.021,156.933 -12.82,156.933 Q1.1@-12.845,156.908
MUX_NANO_TX_14: Q2.1 Q2.2 R49.2 U30.3 | length 7
  Top Layer w0.3: R49.2@-13.745,150.108 -13.137,150.108 -12.84,150.405 -12.84,151.643 Q2.1@-12.825,151.658 ; Q2.2@-12.825,153.558 Q2.1@-12.825,151.658 ; U30.3@-9.995,151.658 Q2.1@-12.825,151.658
Net*_8: *.8 U30.1 | length 50.3
  Top Layer w0.127: v1@-17.185,154.01 v1(-17.164,154.01) -10.786,154.01 -10.333,153.558 U30.1@-9.995,153.558
  Int2 (Sign) w0.127: *.8@-41.409,131.263 -42.662,132.515 -44.062,132.515 -45.033,133.485 -45.033,136.887 -44.325,137.595 -40.515,137.595 -35.352,142.758 -28.417,142.758 v1(-17.164,154.01)
Net*_10: *.10 U29.1 | length 59.8
  Top Layer w0.127: v1(-16.883,159.26) -11.675,159.26 -11.273,158.858 U29.1@-9.996,158.858
  Int2 (Sign) w0.127: *.10@-41.409,128.723 -42.632,129.945 -44.535,129.945 -45.39,130.8 -45.39,139.312 -41.587,143.115 -28.487,143.115 -18.03,153.572 -18.03,158.113 v1(-16.883,159.26)
NetANT1_1: ANT1.1 C54.2 L1.1 | length 20.3
  Top Layer w0.127: ANT1.1@-36.242,153.87 ANT1.1@-37.329,156.002 -38.614,158.014 -38.68,158.122 ANT1.1@-38.783,158.278 -36.926,159.197 -36.86,159.089 ANT1.1@-36.044,158.115 -35.423,157.459 -35.315,157.526 ANT1.1@-34.419,157.856 ; C54.2@-35.158,152.081 C54.2@-35.104,151.646 ; ANT1.1@-32.037,160.571 -31.416,159.915 -31.308,159.981 ANT1.1@-30.412,160.312 -29.711,160.96 -29.602,161.026 ANT1.1@-29.905,161.877 -30.403,163.046 -30.469,163.154 ANT1.1@-29.787,163.791 -28.911,164.109 -28.845,164.001 ANT1.1@-27.69,162.473
NetC17_2: C17.2 U15.8 | length 3.2
  Top Layer w0.4: U15.8@22.133,127.087 23.882,127.087 24.045,126.924 C17.2@24.045,125.745
NetC19_2: C19.2 D4.2 D5.1 | length 32.9
  Bottom Layer w0.5: v1(-9.885,143.088) -9.84,143.181 cw(c-9.39,142.963) -9.744,143.316 -8.43,144.63 6.645,144.63 8.508,142.767 9.368,142.767 9.392,142.743 9.881,142.743 D4.2@9.906,142.767 11.805,142.767 cw(c11.805,142.446) 12.126,142.446 12.126,141.759 12.076,140.845 12.075,140.844 cw(c11.576,140.872) 12.074,140.825 11.805,138.004 ; 11.805,138.003 ccw(c12.303,137.956) 11.805,137.997 11.685,136.501 11.631,135.798 ccw(c13.121,135.798) 13.121,134.308 D5.1@13.305,134.308
NetC24_1: C24.1 D6.2 D7.1 D8.2 | length 13.8
  Top Layer w0.5: v1(-10.279,134.745) ccw(c-10.308,134.775) C24.1@-10.267,134.775
  Bottom Layer w0.5: D8.2@-11.229,143.408 -12.13,143.408 ccw(c-12.13,143.125) -12.33,143.325 ccw(c-11.388,142.383) -12.72,142.383 -12.72,139.898 ccw(c-12.054,139.898) -12.525,139.427 -12.345,139.247 ccw(c-11.646,139.946) D6.2@-11.646,138.958 -12.005,138.958 ccw(c-12.005,138.095) -12.615,138.705 ccw(c-12.072,138.162) -12.84,138.162 -12.84,135.43 ccw(c-11.765,135.43) -12.525,134.67 ccw(c-12.013,135.182) -12.013,134.458 D7.1@-11.395,134.458 -10.94,134.458 ccw(c-10.94,135.358) -10.303,134.722 v1(-10.279,134.745)
NetC44_2: C44.2 R14.2 R15.2 U2.3 | length 17.7
  Bottom Layer w0.09: C44.2@-12.195,128.458 -10.783,128.458 -8.835,126.51 0.36,126.51 0.765,126.915 U2.3@0.765,128.008
  Bottom Layer w0.5: R15.2@-13.545,127.108 R14.2@-13.545,128.408 -13.495,128.458 C44.2@-12.195,128.458
NetC47_2: C47.2 R22.2 R23.2 U2.10 | length 19.5
  Bottom Layer w0.127: C47.2@-12.089,122.884 -10.442,122.884 -9.84,123.486 -8.028,123.486 -7.992,123.45 -7.668,123.45 -7.632,123.486 3.23,123.486 3.305,123.412 U2.10@3.305,122.358
  Bottom Layer w0.5: R23.2@-13.505,121.55 -13.48,121.575 -13.48,122.825 R22.2@-13.455,122.85 -13.421,122.884 C47.2@-12.089,122.884
NetC49_2: C49.2 R24.2 R25.2 U2.12 | length 22.7
  Bottom Layer w0.127: R25.2@-13.495,118.588 -13.448,118.542 -13.448,117.972 -12.821,117.345 -0.238,117.345 0.765,118.348 U2.12@0.765,122.358
  Bottom Layer w0.5: R25.2@-13.495,118.588 -13.495,119.207 R24.2@-13.495,119.938 ; -13.491,119.207 -12.852,119.207 -12.598,119.46 -12.598,119.485 -12.095,119.988 C49.2@-11.995,119.988
NetC51_2: C51.2 R32.1 U21.5 U26.3 | length 19.7
  Bottom Layer w0.127: C51.2@24.758,124.808 24.758,125.817 cw(c27.298,125.817) 27.298,128.357 32.722,128.357 cw(c32.722,128.086) 32.992,128.086 32.992,126.977 cw(c32.94,126.977) U21.5@32.94,126.924 32.94,125.745 33.377,125.308 37.005,125.308 38.505,126.808 R32.1@38.605,126.808
NetC52_2: C52.2 R29.1 R30.1 R33.2 R34.2 U2.5 | length 28.3
  Bottom Layer w0.127: R34.2@-14.99,124.453 -14.99,124.553 -14.379,125.165 -14.379,125.505 -14.081,125.803 R33.2@-13.49,125.803 2.698,125.803 3.305,126.41 ; U2.5@3.305,128.008 3.305,126.41 ; C52.2@7.755,125.858 3.856,125.858 3.305,126.41
  Bottom Layer w0.5: C52.2@7.755,125.858 7.805,125.808 9.055,125.808 R30.1@9.105,125.758 R29.1@9.105,124.458
NetD1_A: D1.A R1.2 | length 1.7
  Top Layer w0.5: D1.A@0.348,162.708 R1.2@2.055,162.708
NetD10_1: D10.1 D11.4 | length 3.7
  Top Layer w0.09: D10.1@-34.1,120.611 -33.685,121.026 -31.214,121.026 -30.964,121.276 -30.805,121.276 D11.4@-30.729,121.351
NetD11_1: D11.1 D12.4 | length 3.6
  Top Layer w0.09: D11.1@-31.537,120.611 -31.367,120.781 -31.19,120.781 -30.974,120.997 -28.778,120.997 -28.504,121.271 -28.254,121.271 D12.4@-28.195,121.331
NetD12_1: D12.1 D13.4 | length 3.6
  Top Layer w0.09: D12.1@-28.987,120.611 -28.817,120.781 -28.64,120.781 -28.401,121.021 -26.194,121.021 -25.954,121.26 -25.756,121.26 D13.4@-25.663,121.353
NetD13_1: D13.1 D14.4 | length 3.6
  Top Layer w0.09: D13.1@-26.437,120.6 -26.285,120.752 -26.134,120.752 -25.871,121.015 -23.77,121.015 -23.715,121.07 -23.627,121.07 -23.437,121.26 -23.215,121.26 D14.4@-23.176,121.299
NetD14_1: D14.1 D39.4 | length 3.5
  Top Layer w0.09: D14.1@-23.917,120.6 -23.637,120.88 -23.423,120.88 -23.343,120.96 -22.83,120.96 -22.725,120.855 -22.725,119.202 D39.4@-23.076,118.851
NetD15_1: D15.1 D16.4 | length 3.7
  Top Layer w0.09: D15.1@-18.737,120.561 -18.567,120.731 -18.39,120.731 -18.145,120.976 -15.949,120.976 -15.704,121.221 -15.422,121.221 D16.4@-15.367,121.275
NetD16_1: D16.1 D17.4 | length 3.5
  Top Layer w0.09: D16.1@-16.187,120.561 -16.017,120.731 -15.84,120.731 -15.595,120.976 -13.549,120.976 -13.304,121.221 -13.119,121.221 D17.4@-13.012,121.328
NetD17_1: D17.1 D18.4 | length 3.7
  Top Layer w0.09: D17.1@-13.787,120.561 -13.617,120.731 -13.44,120.731 -13.195,120.976 -10.999,120.976 -10.754,121.221 -10.557,121.221 D18.4@-10.445,121.333
NetD18_1: D18.1 D19.4 | length 3.7
  Top Layer w0.09: D18.1@-11.237,120.561 -11.067,120.731 -10.89,120.731 -10.645,120.976 -8.416,120.976 -8.218,121.174 -8.074,121.174 -7.935,121.313 D19.4@-7.851,121.313
NetD19_1: D19.1 D44.4 | length 3.7
  Top Layer w0.127: D19.1@-8.687,120.561 -8.536,120.712 -8.385,120.712 -8.132,120.965 -7.709,120.965 -7.583,120.965 -7.453,120.835 -7.453,120.709 -7.453,119.205 D44.4@-7.857,118.801
NetD20_1: D20.1 D21.4 | length 3.6
  Top Layer w0.09: D20.1@-3.597,120.561 -3.427,120.731 -3.25,120.731 -3.005,120.976 -0.859,120.976 -0.614,121.221 -0.373,121.221 D21.4@-0.325,121.269
NetD21_1: D21.1 D22.4 | length 3.5
  Top Layer w0.09: D21.1@-1.097,120.561 -0.927,120.731 -0.75,120.731 -0.505,120.976 1.644,120.976 1.889,121.221 2.087,121.221 D22.4@2.132,121.266
NetD22_1: D22.1 D23.4 | length 3.5
  Top Layer w0.09: D22.1@1.406,120.561 1.576,120.731 1.753,120.731 1.998,120.976 4.141,120.976 4.386,121.221 4.572,121.221 D23.4@4.649,121.298
NetD23_1: D23.1 D24.4 | length 3.5
  Top Layer w0.09: D23.1@3.903,120.561 4.073,120.731 4.25,120.731 4.495,120.976 6.726,120.976 6.887,121.137 6.979,121.137 7.14,121.298 D24.4@7.143,121.298
NetD24_1: D24.1 D49.4 | length 3.8
  Top Layer w0.09: D24.1@6.403,120.561 6.753,120.561 6.847,120.655 6.847,120.828 6.966,120.947 7.612,120.947 7.665,120.894 7.665,119.198 D49.4@7.246,118.779
NetD25_1: D25.1 D26.4 | length 3.5
  Top Layer w0.09: D25.1@11.693,120.661 11.863,120.831 12.04,120.831 12.285,121.076 14.443,121.076 14.688,121.321 14.865,121.321 14.894,121.35 D26.4@14.894,121.368
NetD26_1: D26.1 D27.4 | length 3.5
  Top Layer w0.09: D26.1@14.205,120.661 14.375,120.831 14.552,120.831 14.797,121.076 16.956,121.076 17.201,121.321 17.378,121.321 17.391,121.334 D27.4@17.391,121.35
NetD27_1: D27.1 D28.4 | length 3.5
  Top Layer w0.09: D27.1@16.718,120.661 16.888,120.831 17.065,120.831 17.31,121.076 19.468,121.076 19.713,121.321 19.89,121.321 19.951,121.382 D28.4@19.951,121.386
NetD28_1: D28.1 D29.4 | length 3.5
  Top Layer w0.09: D28.1@19.23,120.661 19.4,120.831 19.577,120.831 19.822,121.076 22.066,121.076 22.316,121.326 22.403,121.326 D29.4@22.432,121.355
NetD29_1: D29.1 D54.4 | length 3.6
  Top Layer w0.09: D29.1@21.743,120.661 21.913,120.831 22.09,120.831 22.306,121.047 22.84,121.047 22.959,120.928 22.959,119.187 D54.4@22.623,118.851
NetD30_1: D30.1 D31.4 | length 3.7
  Top Layer w0.09: D30.1@26.875,120.661 27.014,120.799 27.225,120.799 27.505,121.079 29.524,121.079 29.577,121.131 29.631,121.131 29.854,121.353 30.068,121.353 D31.4@30.205,121.491
NetD31_1: D31.1 D32.4 | length 3.5
  Top Layer w0.09: D31.1@29.375,120.661 29.655,120.941 29.869,120.941 30.004,121.076 32.022,121.076 32.077,121.131 32.131,121.131 32.354,121.353 32.535,121.353 32.59,121.407 D32.4@32.59,121.426
NetD32_1: D32.1 D33.4 | length 3.6
  Top Layer w0.09: D32.1@31.875,120.661 32.155,120.941 32.369,120.941 32.504,121.076 34.735,121.076 34.87,121.211 34.925,121.211 35.111,121.397 D33.4@35.111,121.41
NetD33_1: D33.1 D34.4 | length 3.7
  Top Layer w0.09: D33.1@34.375,120.661 34.535,120.821 34.725,120.821 34.79,120.886 34.814,120.886 34.949,121.021 36.986,121.021 37.088,121.123 37.142,121.123 37.365,121.345 37.578,121.345 D34.4@37.716,121.483
NetD34_1: D34.1 D59.4 | length 3.6
  Top Layer w0.09: D34.1@36.886,120.653 37.166,120.933 37.38,120.933 37.57,121.123 37.862,121.123 38.076,120.909 38.076,119.346 D59.4@37.68,118.95
NetD35_3: D35.4 D36.1 | length 2.1
  Top Layer w0.09: D35.4@-33.27,118.851 -32.321,118.851 D36.1@-31.495,118.025
NetD36_3: D36.4 D37.1 | length 2.1
  Top Layer w0.09: D36.4@-30.665,118.855 -29.749,118.855 D37.1@-28.919,118.025
NetD37_3: D37.4 D38.1 | length 2
  Top Layer w0.09: D37.4@-28.089,118.855 -27.261,118.855 D38.1@-26.426,118.021
NetD38_3: D38.4 D39.1 | length 2
  Top Layer w0.09: D38.4@-25.596,118.851 -24.736,118.851 D39.1@-23.906,118.021
NetD40_3: D40.4 D41.1 | length 2.1
  Top Layer w0.127: D40.4@-17.907,118.801 -17.887,118.781 -16.997,118.781 D41.1@-16.187,117.971
NetD41_3: D41.4 D42.1 | length 1.9
  Top Layer w0.127: D41.4@-15.357,118.801 -15.337,118.781 -14.597,118.781 D42.1@-13.787,117.971
NetD42_3: D42.4 D43.1 | length 2.1
  Top Layer w0.127: D42.4@-12.957,118.801 -12.067,118.801 D43.1@-11.237,117.971
NetD43_3: D43.4 D44.1 | length 2.1
  Top Layer w0.127: D43.4@-10.407,118.801 -9.517,118.801 D44.1@-8.687,117.971
NetD45_3: D45.4 D46.1 | length 2
  Top Layer w0.09: D45.4@-2.754,118.779 -1.914,118.779 D46.1@-1.084,117.949
NetD46_3: D46.4 D47.1 | length 2
  Top Layer w0.09: D46.4@-0.254,118.779 -0.216,118.74 0.624,118.74 D47.1@1.416,117.949
NetD47_3: D47.4 D48.1 | length 2
  Top Layer w0.09: D47.4@2.246,118.779 3.086,118.779 D48.1@3.916,117.949
NetD48_3: D48.4 D49.1 | length 2
  Top Layer w0.09: D48.4@4.746,118.779 4.821,118.703 5.661,118.703 D49.1@6.416,117.949
NetD50_3: D50.4 D51.1 | length 2
  Top Layer w0.09: D50.4@12.623,118.851 13.463,118.851 D51.1@14.293,118.021
NetD51_3: D51.4 D52.1 | length 2
  Top Layer w0.09: D51.4@15.123,118.851 15.963,118.851 D52.1@16.793,118.021
NetD52_3: D52.4 D53.1 | length 2
  Top Layer w0.09: D52.4@17.623,118.851 18.463,118.851 D53.1@19.293,118.021
NetD53_3: D53.4 D54.1 | length 2
  Top Layer w0.09: D53.4@20.123,118.851 20.963,118.851 D54.1@21.793,118.021
NetD55_3: D55.4 D56.1 | length 2
  Top Layer w0.09: D55.4@27.663,118.95 28.495,118.95 D56.1@29.325,118.12
NetD56_3: D56.4 D57.1 | length 2
  Top Layer w0.09: D56.4@30.155,118.95 31.008,118.95 D57.1@31.838,118.12
NetD57_3: D57.4 D58.1 | length 2
  Top Layer w0.09: D57.4@32.668,118.95 33.513,118.95 D58.1@34.343,118.12
NetD58_3: D58.4 D59.1 | length 2
  Top Layer w0.09: D58.4@35.173,118.95 36.02,118.95 D59.1@36.85,118.12
NetD60_1: D60.1 D90.4 | length 3.8
  Top Layer w0.09: D60.1@-35.347,111.231 -35.21,111.093 -35.21,110.879 -34.987,110.657 -34.987,110.374 -34.877,110.264 -34.877,108.569 -34.79,108.482 -34.79,108.427 -34.568,108.204 -34.568,107.991 D90.4@-34.43,107.853
NetD61_1: D61.1 D91.4 | length 3.7
  Top Layer w0.09: D61.1@-32.807,111.231 -32.67,111.093 -32.67,110.879 -32.392,110.602 -32.392,108.534 -32.34,108.482 -32.34,108.427 -32.202,108.289 -32.202,108.075 D91.4@-31.98,107.853